# Altium PCB THERMO_RTD_SENSOR_2CH.PcbDoc (part 1 of 3)
Units mm, origin at the board's own origin, x right, y up, seen from the top; angles counter-clockwise.
Board outline 24 x 76.5 mm, 4 copper layers (L1, P2, L3, L4), stack 1.512 mm thick; 154 components, 120 nets, 487 pads, 253 vias.
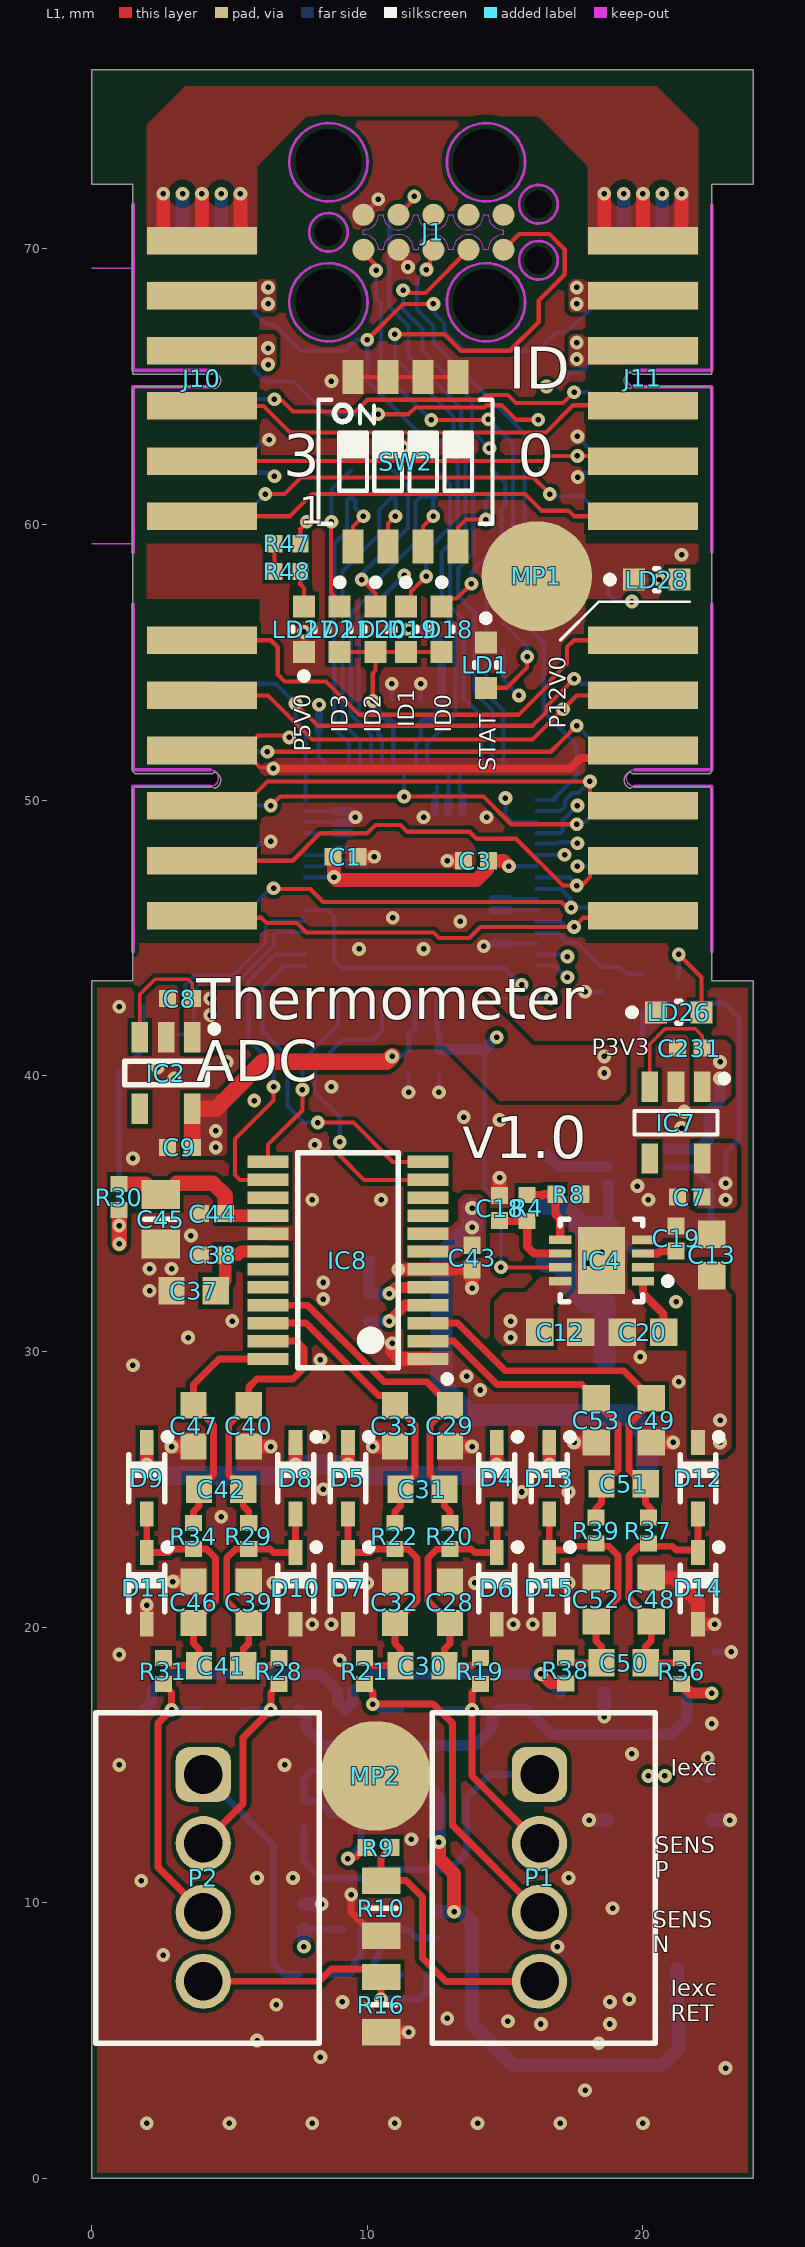
[diagram p0: L1 view]
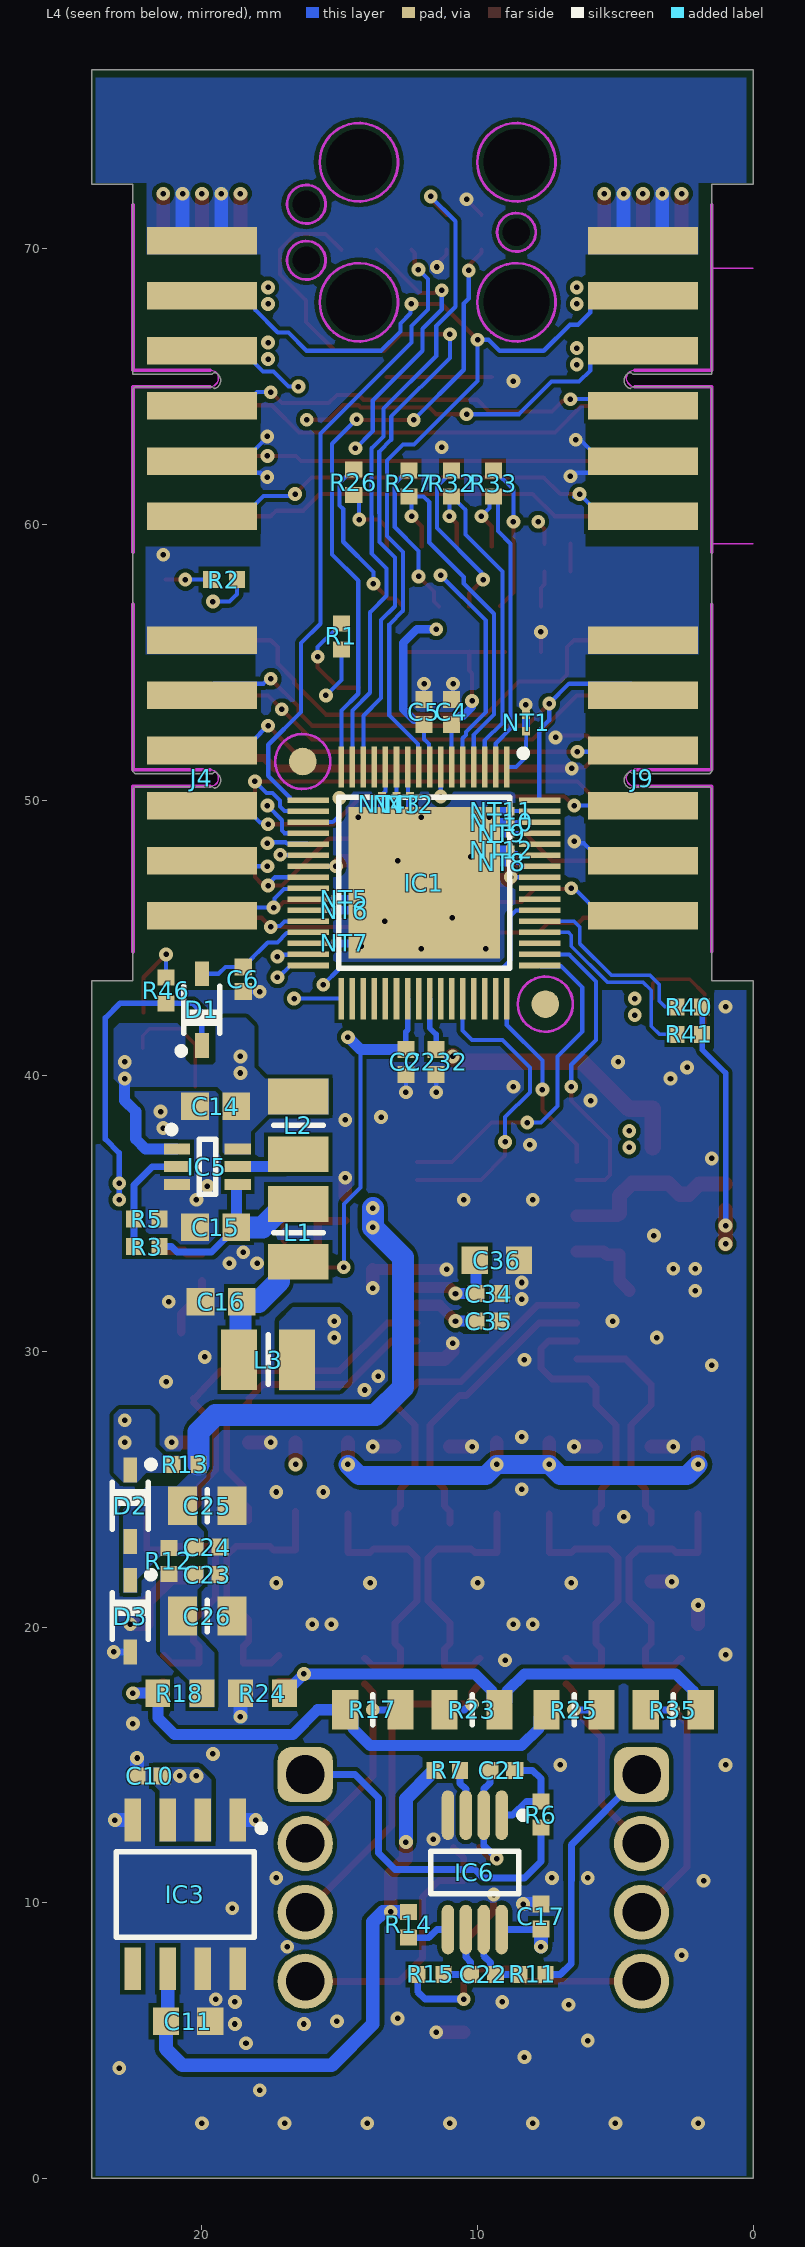
[diagram p1: L4 view, seen from below]
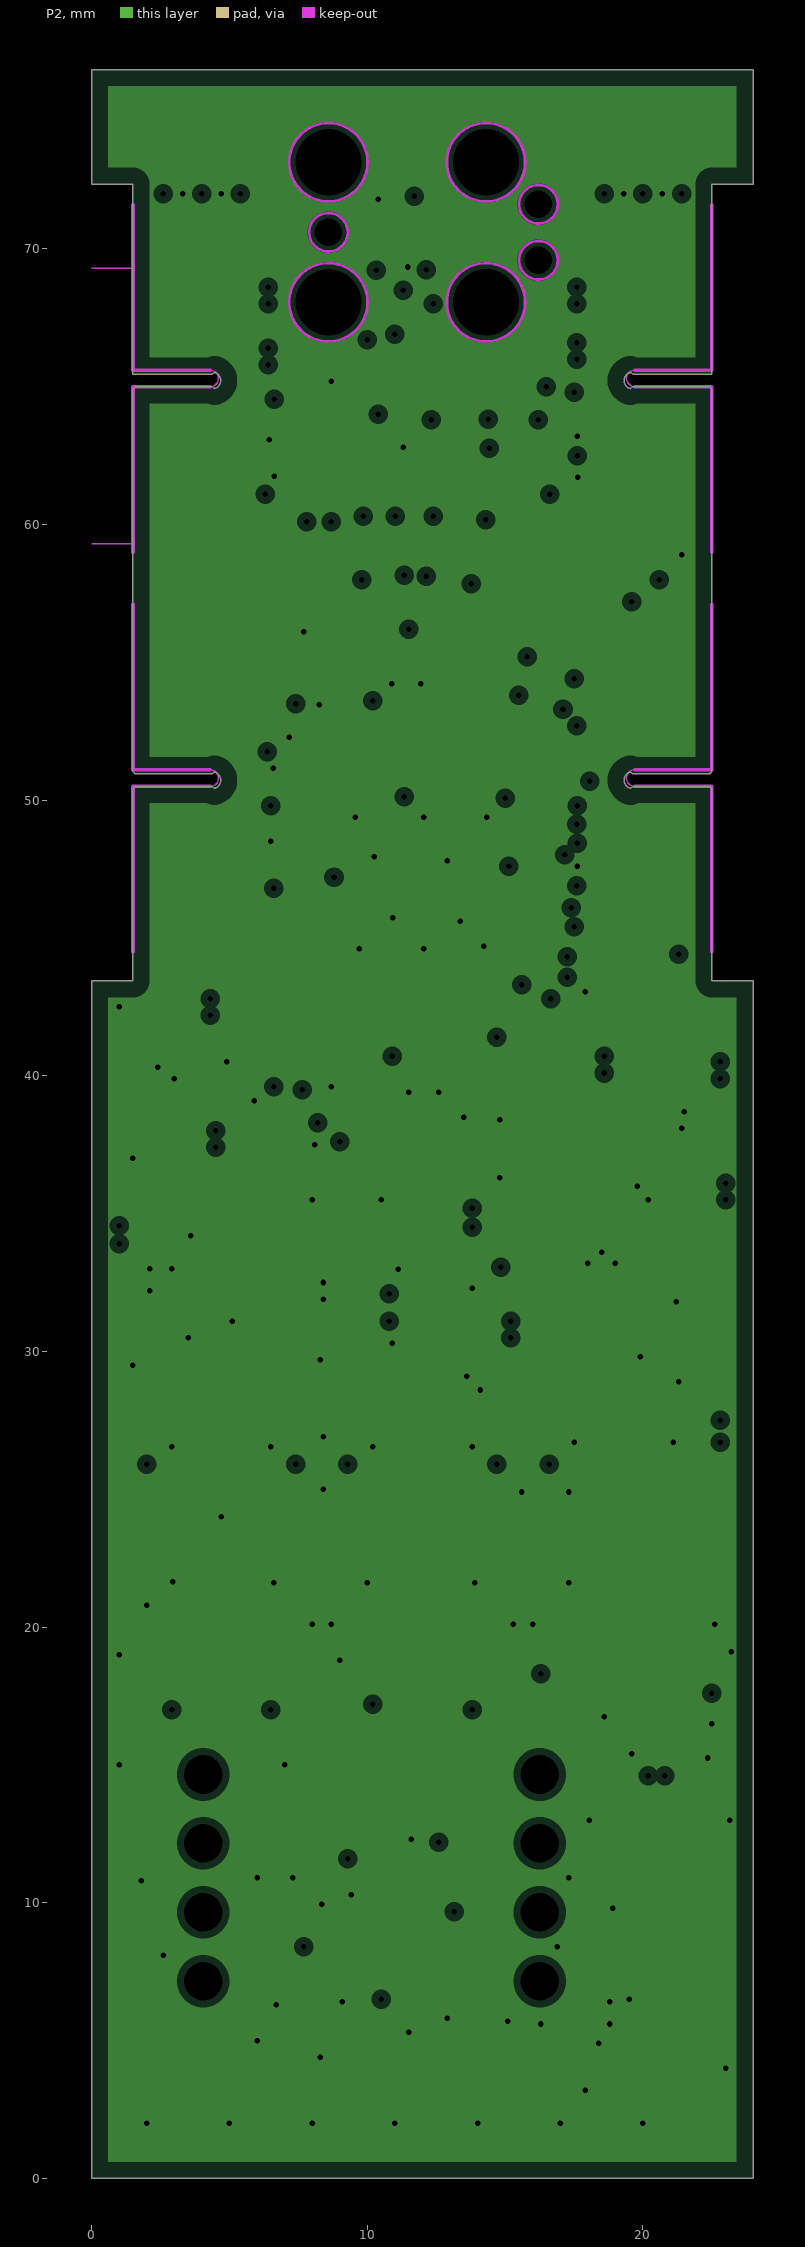
[diagram p2: P2, clearances drawn from the general rule]
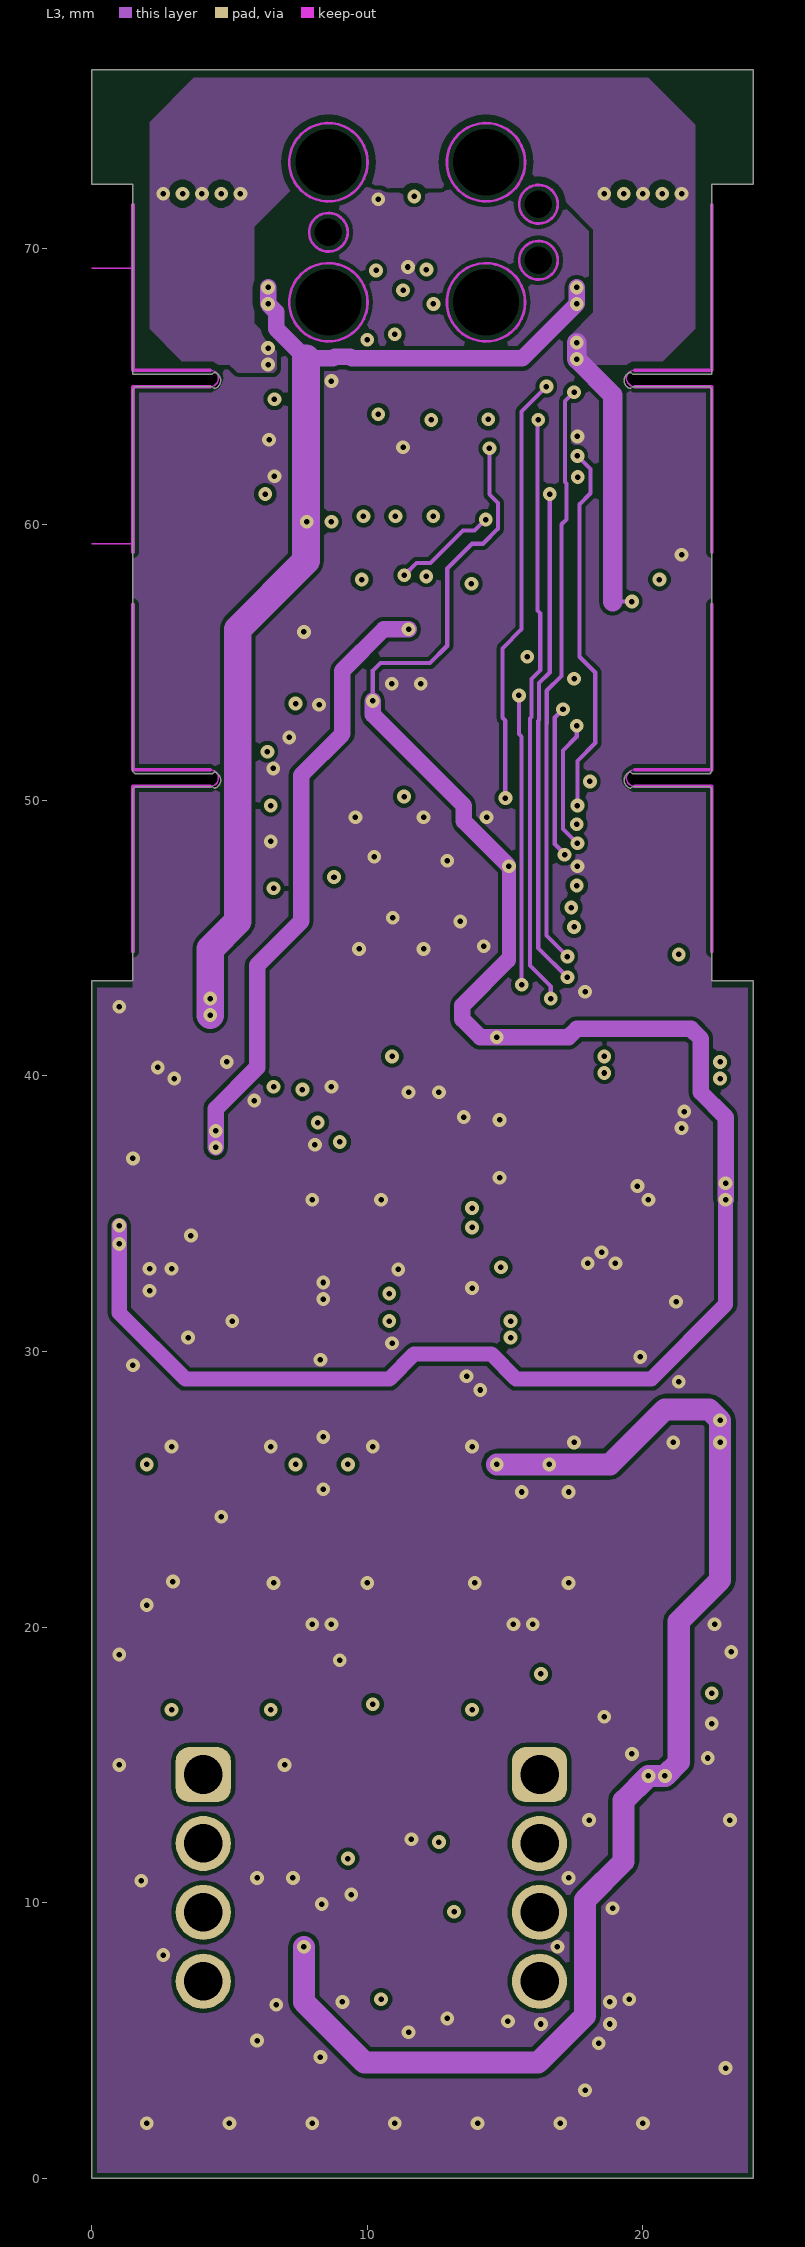
[diagram p3: L3]
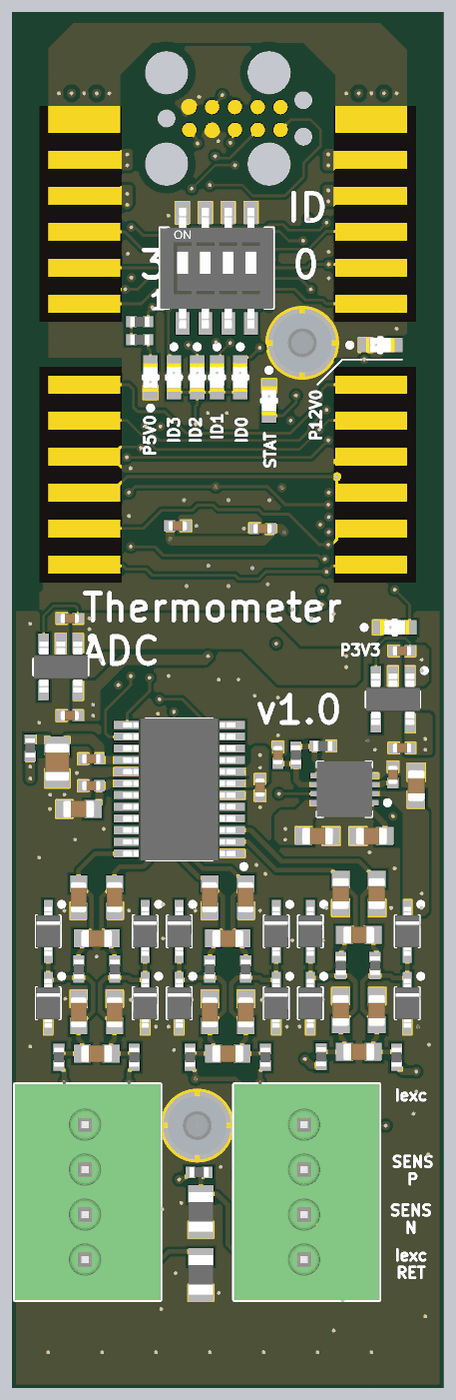
[diagram p5: 3D render of the assembled board from above, using the file's embedded part models]
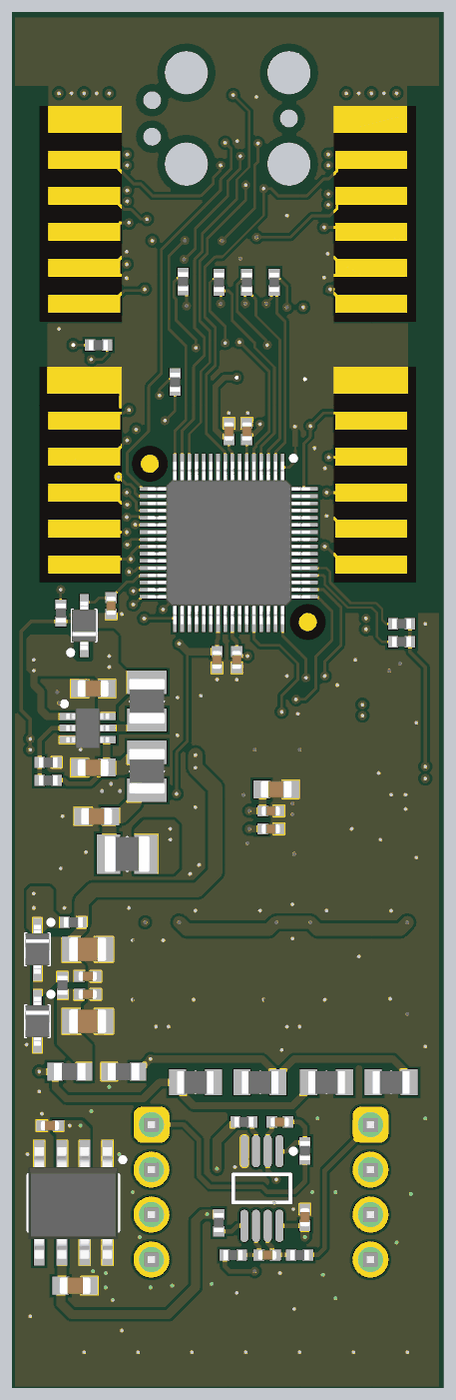
[diagram p6: 3D render of the assembled board from below, using the file's embedded part models]

## Layer stack, top to bottom
TopSolder: solder mask 0.025, Solder Resist, Dk 3.7
L1: signal copper 0.035
Dielectric1: core 0.138, FR-4, Dk 4.3
P2: plane copper 0.018, net GND
Dielectric3: core 1.13, FR-4, Dk 4.6
L3: signal copper 0.018
Dielectric5: core 0.138, FR-4, Dk 4.3
L4: signal copper 0.035
BottomSolder: solder mask 0.025, Solder Resist, Dk 3.7

## Board outline
0,0 0,43.44 1.5,43.44 1.5,50.413 1.577,50.49 4.377,50.49 4.452,50.428 ccw(c4.377,50.723) 4.681,50.723 ccw(c4.377,50.723) 4.452,51.019 4.377,50.957 1.577,50.957 1.5,51.033 1.5,57.023 1.5,64.913 1.577,64.99 4.377,64.99 4.452,64.928 ccw(c4.377,65.223) 4.681,65.223 ccw(c4.377,65.223) 4.452,65.519 4.377,65.457 1.5,65.457 1.5,72.347 0,72.347 0,76.5 24,76.5 24,72.347 22.5,72.347 22.5,65.457 19.623,65.457 19.548,65.519 ccw(c19.623,65.223) 19.319,65.223 ccw(c19.623,65.223) 19.548,64.928 19.623,64.99 22.423,64.99 22.5,64.913 22.5,57.023 22.5,51.033 22.423,50.957 19.623,50.957 19.548,51.019 ccw(c19.623,50.723) 19.319,50.723 ccw(c19.623,50.723) 19.548,50.428 19.623,50.49 22.423,50.49 22.5,50.413 22.5,43.44 24,43.44 24,0

## Design rules (kind name [scope] priority, off if disabled: settings)
Clearance Clearance_DIFF [(InDifferentialPairClass('All Differential Pairs'))] p1: gap=0.127 ignorepadtopadclearanceinfootprint=FALSE except(0: Arc-Hole Track-Hole SMDPad-Hole THPad-Hole Via-Hole Fill-Hole Poly-Hole Region-Hole Text-Hole; 0.254: Arc-Poly Track-Poly SMDPad-Poly THPad-Poly Via-Poly Fill-Poly Poly-Poly Poly-Region Poly-Text)
Clearance [All] p2: gap=0.127 ignorepadtopadclearanceinfootprint=FALSE except(0: Arc-Hole Track-Hole SMDPad-Hole THPad-Hole Via-Hole Fill-Hole Poly-Hole Region-Hole Text-Hole; 0.15: Arc-Poly Track-Poly SMDPad-Poly THPad-Poly Via-Poly Fill-Poly Poly-Poly)
ComponentClearance [All] p1 off: gap=0.254 collisioncheckmode=3 verticalgap=0.254 showdistances=FALSE
DiffPairsRouting [All] p1: maxlimit=0.254 minlimit=0.127 mostfreqgap=0.127 toplayer_minwidth=0.127 toplayer_maxwidth=0.381 toplayer_prefwidth=0.254 midlayer1_minwidth=0.127 midlayer1_maxwidth=0.381 midlayer1_prefwidth=0.254 bottomlayer_minwidth=0.127 bottomlayer_maxwidth=0.381 bottomlayer_prefwidth=0.254 maxuncoupledlength=12.7
FabricationTestPointUsage TestPointUsage [All] p1: valid=0 allowmultiple=FALSE
FabricationTestpoint Testpoint [All] p1: side=3 testpointundercomponent=TRUE minsize=1.016 maxsize=2.54 preferedsize=1.524 minholesize=0.508 maxholesize=1.016 preferedholesize=0.813 testpointgrid=0.025 allowsidetop=TRUE allowsidebottom=TRUE usegrid=TRUE gridtolerance=0
Height [All] p1 off: minheight=0 maxheight=25.4 prefheight=12.7
HoleSize [All] p1: absolutevalues=TRUE maxlimit=3.81 minlimit=0.025 maxpercent=80.000 minpercent=20.000
HoleToHoleClearance [All] p1: gap=0.025 allowstackedmicrovias=TRUE
MinimumSolderMaskSliver [All] p1: minsoldermaskwidth=0
PlaneClearance [All] p1: clearance=0.254
PlaneConnect [All] p1: planeconnectstyle=Direct reliefexpansion=0.508 reliefentries=4 reliefconductorwidth=0.254 reliefairgap=0.254
PolygonConnect [All] p1: connectstyle=Direct reliefconductorwidth=0.254 reliefentries=4 polygonreliefangle="45 Angle" airgapwidth=0.254
PolygonConnect PolygonConnect_pad [(InPadClass('All Pads'))] p2: connectstyle=Relief reliefconductorwidth=0.254 reliefentries=4 polygonreliefangle="90 Angle" airgapwidth=0.254
RoutingVias [All] p1: holewidth=0.2 width=0.5 viastyle="Through Hole" minholewidth=0.2 minwidth=0.5 maxholewidth=1 maxwidth=2
SilkToSilkClearance [All] p1: silktosilkclearance=0
SilkToSolderMaskClearance SilkscreenOverComponentPads [IsPad] p1: minsilkscreentomaskgap=0 clearancetoexposedcopper=TRUE
SolderMaskExpansion [All] p1: expansion=0.051 istentingtop=FALSE
SupplyNets "Schematic Supply Nets_6" [InNet('P5V0A')] p1: voltage=0.000
SupplyNets "Schematic Supply Nets_5" [InNet('P6V0A')] p2: voltage=0.000
SupplyNets "Schematic Supply Nets_2" [InNet('P1V8')] p3: voltage=0.000
SupplyNets "Schematic Supply Nets_4" [InNet('P5V0')] p4: voltage=0.000
SupplyNets "Schematic Supply Nets_3" [InNet('GND')] p5: voltage=0.000
SupplyNets "Schematic Supply Nets_1" [InNet('P12V0')] p6: voltage=0.000
SupplyNets "Schematic Supply Nets" [InNet('P3V3')] p7: voltage=0.000
Width "Schematic Width Constraint_3" [InNet('SENS0_P')] p1: maxlimit=0.381 minlimit=0.254 preferedwidth=0.254
Width "Schematic Width Constraint_2" [InNet('SENS1_N')] p2: maxlimit=0.381 minlimit=0.254 preferedwidth=0.254
Width "Schematic Width Constraint_1" [InNet('SENS0_N')] p3: maxlimit=0.381 minlimit=0.254 preferedwidth=0.254
Width "Schematic Width Constraint" [InNet('SENS1_P')] p4: maxlimit=0.381 minlimit=0.254 preferedwidth=0.254
Width [All] p5: maxlimit=1.27 minlimit=0.127 preferedwidth=0.127
18 further rules are at their usual default settings.

## Classes and differential pairs
component class THERMO_RTD_SENSOR_2CH: C10 C11 C12 C13 C14 C15 C16 C17 C18 C19 C20 C21 C22 C23 C24 C25 C26 C28 C29 C30 C31 C32 C33 C34 C35 C36 C37 C38 C39 C40 C41 C42 C43 C44 C45 C46 C47 C48 C49 C50 C51 C52 C53 D2 D3 D4 D5 D6 D7 D8 D9 D10 D11 D12 D13 D14 D15 IC3 IC4 IC5 IC6 IC8 L1 L2 L3 P1 P2 R3 R4 R5 R6 R7 R8 R9 R10 R11 R12 R13 R14 R15 R16 R17 R18 R19 R20 R21 R22 R23 R24 R25 R28 R29 R30 R31 R34 R35 R36 R37 R38 R39 R40 R41
component class U_SPI_IFC: C1 C2 C3 C4 C5 C6 C7 C8 C9 C231 C232 D1 IC1 IC2 IC7 J1 J4 J9 J10 J11 LD1 LD18 LD19 LD20 LD21 LD26 LD27 LD28 MP1 MP2 NT1 NT2 NT3 NT4 NT5 NT6 NT7 NT8 NT9 NT10 NT11 NT12 R1 R2 R26 R27 R32 R33 R46 R47 R48 SW2

## Components (designator, comment, footprint, x,y, rotation, side; value= is the part's Value field where it differs from the comment)
C1 "1uF" CAPC1005X55N 9.212,47.947 r180 top
C2 "1uF" CAPC1005X55N 12.6,40.5 r90 bottom
C3 "1uF" CAPC1005X55N 13.943,47.8 r0 top
C4 "1uF" CAPC1005X55N 10.94,53.2 r270 bottom
C5 "1uF" CAPC1005X55N 11.94,53.2 r270 bottom
C6 "1uF" CAPC1005X55N 18.5,43.5 r90 bottom
C7 "1uF" CAPC1005X55N 21.7,35.6 r0 top
C8 "1uF" CAPC1005X55N 3.2,42.8 r0 top
C9 "1uF" CAPC1005X55N 3.2,37.4 r0 top
C10 "100nF" CAPC1005X55N 21.9,14.6 r0 bottom
C11 "1uF" CAPC1608X87N 20.5,5.7 r0 bottom
C12 "10uF" CAPC1608X80N 17,30.7 r180 top
C13 "10uF" CAPC1608X80N 22.5,33.5 r270 top
C14 "10uF" CAPC1608X80N 19.5,38.9 r180 bottom
C15 "10uF" CAPC1608X80N 19.5,34.5 r180 bottom
C16 "10uF" CAPC1608X80N 19.3,31.8 r180 bottom
C17 "100nF" CAPC1005X55N 7.7,9.5 r270 bottom
C18 "1uF" CAPC1005X55N 14.8,35.2 r270 top
C19 "1uF" CAPC1005X55N 21.2,34.1 r270 top
C20 "10uF" CAPC1608X80N 20,30.7 r0 top
C21 "1nF" CAPC1005X55N 9.1,14.8 r180 bottom
C22 "1nF" CAPC1005X55N 9.8,7.4 r180 bottom
C23 "100nF" CAPC1005X55N 19.8,21.9 r180 bottom
C24 "100nF" CAPC1005X55N 19.8,22.9 r180 bottom
C25 "10uF" CAPC2012X135N 19.8,24.4 r180 bottom
C26 "10uF" CAPC2012X135N 19.8,20.4 r180 bottom
C28 "1nF" CAPC1608X90N 13,20.9 r90 top
C29 "1nF" CAPC1608X90N 13,27.3 r270 top
C30 "10nF" CAPC1608X87N 12,18.6 r180 top
C31 "10nF" CAPC1608X87N 12,25 r180 top
C32 "1nF" CAPC1608X90N 11,20.9 r270 top
C33 "1nF" CAPC1608X90N 11,27.3 r90 top
C34 "100nF" CAPC1005X55N 9.6,32.1 r180 bottom
C35 "100nF" CAPC1005X55N 9.6,31.1 r180 bottom
C36 "1uF" CAPC1608X87N 9.3,33.3 r0 bottom
C37 "1uF" CAPC1608X87N 3.7,32.2 r0 top
C38 "100nF" CAPC1005X55N 4.4,33.5 r180 top
C39 "1nF" CAPC1608X90N 5.7,20.9 r90 top
C40 "1nF" CAPC1608X90N 5.7,27.3 r270 top
C41 "10nF" CAPC1608X87N 4.7,18.6 r180 top
C42 "10nF" CAPC1608X87N 4.7,25 r180 top
C43 "100nF" CAPC1005X55N 13.8,33.4 r270 top
C44 "100nF" CAPC1005X55N 4.4,35 r180 top
C45 "10uF" CAPC2012X135N 2.5,34.8 r270 top
C46 "1nF" CAPC1608X90N 3.7,20.9 r270 top
C47 "1nF" CAPC1608X90N 3.7,27.3 r90 top
C48 "10nF" CAPC1608X87N 20.3,21 r90 top
C49 "10nF" CAPC1608X87N 20.3,27.5 r270 top
C50 "100nF" CAPC1608X87N 19.3,18.7 r0 top
C51 "100nF" CAPC1608X87N 19.3,25.2 r0 top
C52 "10nF" CAPC1608X87N 18.3,21 r270 top
C53 "10nF" CAPC1608X87N 18.3,27.5 r90 top
C231 "1uF" CAPC1005X55N 21.7,41 r0 top
C232 "1uF" CAPC1005X55N 11.5,40.5 r90 bottom
D1 "BAT165" SOD2512X110N 20,42.4 r90 bottom
D2 "BAS416" SOD2512X110N 22.6,24.4 r270 bottom
D3 "BAS416" SOD2512X110N 22.6,20.4 r270 bottom
D4 "BAS416" SOD2512X110N 14.7,25.4 r270 top
D5 "BAS416" SOD2512X110N 9.3,25.4 r270 top
D6 "BAS416" SOD2512X110N 14.7,21.4 r270 top
D7 "BAS416" SOD2512X110N 9.3,21.4 r270 top
D8 "BAS416" SOD2512X110N 7.4,25.4 r270 top
D9 "BAS416" SOD2512X110N 2,25.4 r270 top
D10 "BAS416" SOD2512X110N 7.4,21.4 r270 top
D11 "BAS416" SOD2512X110N 2,21.4 r270 top
D12 "BAS416" SOD2512X110N 22,25.4 r270 top
D13 "BAS416" SOD2512X110N 16.6,25.4 r270 top
D14 "BAS416" SOD2512X110N 22,21.4 r270 top
D15 "BAS416" SOD2512X110N 16.6,21.4 r270 top
IC1 "5M160ZE64A5N" QFP40P900X900X120-65N-S550 11.94,47 r270 bottom locked
IC2 "AP2112K-1.8TRG1" SOT95P285X140-5N 2.7,40.1 r270 top
IC3 "LM4140ACM-1.2/NOPB" SOIC127P600X175-8N 20.6,10.3 r270 bottom
IC4 "ADM7151ACPZ" SON50P300X300X80-9N-R170X244 18.5,33.3 r180 top
IC5 "TPS61222DCKT" SOT65P210X110-6N 19.8,36.7 r180 bottom
IC6 "ADA4528-2ARMZ-RL" ADI-RM-8_N 10.1,11.1 r270 bottom
IC7 "AP2112K-3.3TRG1" SOT95P285X140-5N 21.2,38.3 r270 top
IC8 "AD7172-2BRUZ" SOP65P640X120-24N 9.3,33.3 r180 top
J1 "TC2050-IDC" TC2050-IDC 12.4,70.6 r0 top
J4 "" EDGE12T1B6_P200W1000L0F100X400 20,50.8 r270 bottom
J9 "" EDGE12T5B10_P200W1000L0F100X400 4,50.8 r90 bottom
J10 "" EDGE12T1B6_P200W1000L0F100X400 4,65.3 r270 top
J11 "" EDGE12T5B10_P200W1000L0F100X400 20,65.3 r90 top
L1 "4.7uH" INDC2520X120N 16.5,34.3 r270 bottom
L2 "4.7uH" INDC2520X120N 16.5,38.2 r270 bottom
L3 "4.7uH" INDC2520X120N 17.6,29.7 r180 bottom
LD1 "Green" LED_KINGBRIGHT_KP-1608CGCK 14.3,54.9 r270 top
LD18 "Green" LED_KINGBRIGHT_KP-1608CGCK 12.7,56.2 r270 top
LD19 "Green" LED_KINGBRIGHT_KP-1608CGCK 11.4,56.2 r270 top
LD20 "Green" LED_KINGBRIGHT_KP-1608CGCK 10.3,56.2 r270 top
LD21 "Green" LED_KINGBRIGHT_KP-1608CGCK 9,56.2 r270 top
LD26 "Green" LED_KINGBRIGHT_KP-1608CGCK 21.3,42.3 r0 top
LD27 "Green" LED_KINGBRIGHT_KP-1608CGCK 7.7,56.2 r90 top
LD28 "Green" LED_KINGBRIGHT_KP-1608CGCK 20.5,58 r0 top
MP1 "M1.6 x 3mm" 97730306330 16.15,58.125 r0 top
MP2 "M1.6 x 3mm" 97730306330 10.3,14.6 r0 top
NT1 "Net Tie" "Net Tie 3" 8.24,52.5 r90 bottom net-tie
NT2 "Net Tie" "Net Tie 3" 12.453,50.148 r270 bottom net-tie
NT3 "Net Tie" "Net Tie 3" 12.94,50.148 r270 bottom net-tie
NT4 "Net Tie" "Net Tie 3" 13.463,50.148 r270 bottom net-tie
NT5 "Net Tie" "Net Tie 3" 15.14,46.4 r180 bottom net-tie
NT6 "Net Tie" "Net Tie 3" 15.14,46 r180 bottom net-tie
NT7 "Net Tie" "Net Tie 3" 15.14,44.8 r180 bottom net-tie
NT8 "Net Tie" "Net Tie 3" 8.814,47.75 r0 bottom net-tie
NT9 "Net Tie" "Net Tie 3" 8.814,48.8 r0 bottom net-tie
NT10 "Net Tie" "Net Tie 3" 8.814,49.2 r0 bottom net-tie
NT11 "Net Tie" "Net Tie 3" 8.814,49.6 r0 bottom net-tie
NT12 "Net Tie" "Net Tie 3" 8.814,48.2 r0 bottom net-tie
P1 "691382000004" 691382000004 16.4,10.9 r270 top
P2 "691382000004" 691382000004 4.2,10.9 r270 top
R1 "3k3" RESC1005X40N 14.94,55.941 r270 bottom
R2 "10k" RESC1005X40N 19.2,58 r0 bottom
R3 "36k" RESC1005X40N 22,33.8 r180 bottom
R4 "91k" RESC1005X40N 15.8,35.2 r270 top
R5 "3k3" RESC1005X40N 22,34.8 r0 bottom
R6 "120k" RESC1005X40N 7.7,13.2 r270 bottom
R7 "120k" RESC1005X40N 11.1,14.8 r180 bottom
R8 "36k" RESC1005X40N 17.3,35.7 r180 top
R9 "0" RESC1005X40N 10.4,12 r0 top
R10 "120k" RESC2012X60N 10.5,9.8 r90 top
R11 "120k" RESC1005X40N 8,7.4 r180 bottom
R12 "33" RESC1005X40N 21.2,22.4 r90 bottom
R13 "33" RESC1005X40N 20.6,25.9 r0 bottom
R14 "120k" RESC1005X40N 12.5,9.2 r270 bottom
R15 "0" RESC1005X40N 11.7,7.4 r0 bottom
R16 "120k" RESC2012X60N 10.5,6.3 r90 top
R17 "5k" RESC2013X64N 13.8,17 r0 bottom
R18 "0" RESC1608X55N 20.8,17.6 r180 bottom
R19 "51" RESC1005X40N 14.1,18.4 r90 top
R20 "2k7" RESC1005X40N 13,23.3 r90 top
R21 "51" RESC1005X40N 9.9,18.4 r90 top
R22 "2k7" RESC1005X40N 11,23.3 r90 top
R23 "5k" RESC2013X64N 10.2,17 r180 bottom
R24 "0" RESC1608X55N 17.8,17.6 r0 bottom
R25 "5k" RESC2013X64N 6.5,17 r0 bottom
R26 "3k3" RESC1005X40N 14.491,61.532 r270 bottom
R27 "3k3" RESC1005X40N 12.493,61.49 r270 bottom
R28 "51" RESC1005X40N 6.8,18.4 r90 top
R29 "2k7" RESC1005X40N 5.7,23.3 r90 top
R30 "33" RESC1005X40N 1,35.6 r270 top
R31 "51" RESC1005X40N 2.6,18.4 r90 top
R32 "3k3" RESC1005X40N 10.94,61.49 r270 bottom
R33 "3k3" RESC1005X40N 9.414,61.49 r270 bottom
R34 "2k7" RESC1005X40N 3.7,23.3 r90 top
R35 "5k" RESC2013X64N 2.9,17 r180 bottom
R36 "270" RESC1005X40N 21.4,18.4 r90 top
R37 "270" RESC1005X40N 20.2,23.5 r90 top
R38 "270" RESC1005X40N 17.2,18.43 r90 top
R39 "270" RESC1005X40N 18.3,23.5 r90 top
R40 "3k3" RESC1005X40N 2.32,42.5 r0 bottom
R41 "3k3" RESC1005X40N 2.32,41.5 r0 bottom
R46 "3k3" RESC1005X40N 21.3,43.1 r270 bottom
R47 "3k3" RESC1005X40N 7.1,59.3 r0 top
R48 "3k3" RESC1005X40N 7.1,58.3 r180 top
SW2 "Switch" SW_OMRON_A6H-4102 11.39,62.275 r90 top

## Footprints (in the part's own frame and the unit in brackets; to place one, negate y for a bottom-side part, rotate by r counter-clockwise, add the part's x,y. Pads: shape width x height; smd on the part's side, far side on the other; paste and mask are expansions set on the pad)
97730306330 [mm] "SMT Steel Spacer with internal Thread M1.6 Bottom closed, height 3mm"
  round 4 smd paste-2539.97: 1(0,0)
  body extent -1.65,-1.65 1.65,1.65, height 3
691382000004 [mm] "Vertical PCB Header, pitch 2.5mm, 04p"
  rrect50% 2x2 hole 1.4: 1(-3.75,-0.15)
  round 2 hole 1.4: 2(-1.25,-0.15) 3(1.25,-0.15) 4(3.75,-0.15)
  silkscreen extent -6,-4.05 6,4.05, body extent -6,-4.05 6,4.05, height 10.14
ADI-RM-8_N [mm] "SOP, 8-Leads, Body 3x3mm, Pitch 0.65mm, IPC Medium Density"
  oval 1.8x0.45 smd: 1(-2.075,0.975) 2(-2.075,0.325) 3(-2.075,-0.325) 4(-2.075,-0.975) 5(2.075,-0.975) 6(2.075,-0.325) 7(2.075,0.325) 8(2.075,0.975)
  silkscreen extent -2.2,-1.6 0.77,1.87, body extent -1.6,-1.6 1.6,1.6, height 1.1
CAPC1005X55N [mm] "Capacitor, Non-Polarized, Chip; 1.00mm L X 0.50mm W X 0.70mm H, IPC Medium Density"
  rect 0.62x0.62 smd: 1(-0.45,0) 2(0.45,0)
  body extent -0.52,-0.27 0.53,0.28, height 0.55
CAPC1608X80N [mm] "Chip Capacitor, Body 1.6x0.8mm IPC Medium Density"
  rect 1x1 smd: 1(-0.75,0) 2(0.75,0)
  body extent -0.87,-0.47 0.88,0.48, height 0.8
CAPC1608X87N [mm] "Chip Capacitor, Body 1.6x0.8mm IPC Medium Density"
  rect 0.95x1 smd: 1(-0.8,0) 2(0.8,0)
  body extent -0.87,-0.47 0.88,0.48, height 0.87
CAPC1608X90N [mm] "Chip Capacitor, Body 1.6x0.8mm IPC Medium Density"
  rect 0.95x0.95 smd: 1(-0.75,0) 2(0.75,0)
  body extent -0.85,-0.45 0.85,0.45, height 0.9
CAPC2012X135N [mm] "Chip Capacitor, Body 2.0x1.25mm, IPC Medium Density"
  rect 1.05x1.4 smd: 1(-0.9,0) 2(0.9,0)
  silkscreen extent 0,-0.58 0,0.58, body extent -1.05,-0.67 1.05,0.68, height 1.25
EDGE12T1B6_P200W1000L0F100X400 [mm] "12 contacts Board Edge Connector, First Left Top Pad 1, First Left Bottom Pad 2, Pitch 2mm, Length 0mm, Width 12.5mm, Finger Lenght 4mm, Finger Width 1mm"
  rect 1x4 smd paste-0.5: 1(-5,0) 2(-3,0) 3(-1,0) 4(1,0) 5(3,0) 6(5,0)
  rect 1x4 smd far side paste-0.5: 7(-5,0) 8(-3,0) 9(-1,0) 10(1,0) 11(3,0) 12(5,0)
  KeepOutLayer lines w0.05: 0.3,0.3 ccw(c0,0.3) -0.3,0.3
  KeepOutLayer lines w0.13: 0.3,0.3 0.3,-2.5 6.3,-2.5 ; -0.3,0.3 -0.3,-2.5 -6.3,-2.5
EDGE12T5B10_P200W1000L0F100X400 [mm] "12 contacts Board Edge Connector, First Left Top Pad 5, First Left Bottom Pad 10, Pitch 2mm, Length 0mm, Width 12.5mm, Finger Lenght 4mm, Finger Width 1mm"
  rect 1x4 smd paste-0.5: 1(5,0) 2(3,0) 3(1,0) 4(-1,0) 5(-3,0) 6(-5,0)
  rect 1x4 smd far side paste-0.5: 7(5,0) 8(3,0) 9(1,0) 10(-1,0) 11(-3,0) 12(-5,0)
  KeepOutLayer lines w0.05: -0.3,0.3 cw(c0,0.3) 0.3,0.3
  KeepOutLayer lines w0.13: -6.3,-2.5 -0.3,-2.5 -0.3,0.3 ; 6.3,-2.5 0.3,-2.5 0.3,0.3
INDC2520X120N [mm] "Chip Inductor, EIA 1008, Metric 2520, Body 2.50mm L X 2.00mm W X 1.20mm H body, IPC Medium Density"
  rect 1.3x2.2 smd: 1(-1.05,0) 2(1.05,0)
  silkscreen extent 0,-0.9 0,0.9, body extent -1.25,-1 1.25,1, height 1.2
LED_KINGBRIGHT_KP-1608CGCK [mm] "SMT Green LED, Case 0603, Body L 1.60mm x W 0.80mm x H 1.10mm"
  rect 0.8x0.8 smd: 1(-0.825,0) 2(0.825,0)
  silkscreen extent -1.82,-0.4 0.08,0.4, body extent -0.8,-0.4 0.8,0.4, height 1.1
"Net Tie 3" [mm] "SMD Net Tie"
  rect 0.3x0.3 smd paste-2539.97 mask-0.064: 1(0,0) 2(0.6,0)
  L1 lines w0.3: 0,0 0.6,0
QFP40P900X900X120-65N-S550 [mm] "QFP, 0.40mm Pitch, Square; 64 Pin, 7.00mm L X 7.00mm W X 1.20mm H Body (w/Thermal Tab), IPC Medium Density"
  rect 1.5x0.2 smd: 1(-4.2,3) 2(-4.2,2.6) 3(-4.2,2.2) 4(-4.2,1.8) 5(-4.2,1.4) 6(-4.2,1) 7(-4.2,0.6) 8(-4.2,0.2) 9(-4.2,-0.2) 10(-4.2,-0.6) 11(-4.2,-1) 12(-4.2,-1.4) 13(-4.2,-1.8) 14(-4.2,-2.2) 15(-4.2,-2.6) 16(-4.2,-3) 33(4.2,-3) 34(4.2,-2.6) 35(4.2,-2.2) 36(4.2,-1.8) 37(4.2,-1.4) 38(4.2,-1) 39(4.2,-0.6) 40(4.2,-0.2) 41(4.2,0.2) 42(4.2,0.6) 43(4.2,1) 44(4.2,1.4) 45(4.2,1.8) 46(4.2,2.2) 47(4.2,2.6) 48(4.2,3)
  rect 0.2x1.5 smd: 17(-3,-4.2) 18(-2.6,-4.2) 19(-2.2,-4.2) 20(-1.8,-4.2) 21(-1.4,-4.2) 22(-1,-4.2) 23(-0.6,-4.2) 24(-0.2,-4.2) 25(0.2,-4.2) 26(0.6,-4.2) 27(1,-4.2) 28(1.4,-4.2) 29(1.8,-4.2) 30(2.2,-4.2) 31(2.6,-4.2) 32(3,-4.2) 49(3,4.2) 50(2.6,4.2) 51(2.2,4.2) 52(1.8,4.2) 53(1.4,4.2) 54(1,4.2) 55(0.6,4.2) 56(0.2,4.2) 57(-0.2,4.2) 58(-0.6,4.2) 59(-1,4.2) 60(-1.4,4.2) 61(-1.8,4.2) 62(-2.2,4.2) 63(-2.6,4.2) 64(-3,4.2)
  rect 5.5x5.5 smd: 65(0,0)
  round 1 smd paste-0.51 mask+0.5: FTG1(-4.4,-4.4) FTG2(4.4,4.4)
  L1 keep-out circle w0.1: c4.4,4.4 r1
  L1 keep-out circle w0.1: c-4.4,-4.4 r1
  silkscreen extent -4.82,-3.1 3.1,3.72, body extent -4.52,-4.52 4.52,4.52, height 1.2
RESC1005X40N [mm] "Chip Resistor, EIA 0402, Metric 1005, Body 1.0x0.5mm, IPC Medium Density"
  rect 0.58x0.62 smd: 1(-0.47,0) 2(0.47,0)
  body extent -0.52,-0.27 0.53,0.28, height 0.4
RESC1608X55N [mm] "Chip Resistor, EIA 0603, Metric 1608, Body 1.6x0.8mm, IPC Medium Density"
  rect 0.9x1 smd: 1(-0.8,0) 2(0.8,0)
  body extent -0.87,-0.47 0.88,0.48, height 0.55
RESC2012X60N [mm] "Chip Resistor, EIA 0805, Metric 2012, Body 2.0x1.2mm, IPC Medium Density"
  rect 0.95x1.4 smd: 1(-1,0) 2(1,0)
  silkscreen extent 0,-0.55 0,0.55, body extent -1.1,-0.67 1.1,0.68, height 0.6
RESC2013X64N [mm] "Chip Resistor, EIA 0805, Metric 2013, Body 2.03x1.27mm, IPC Medium Density"
  rect 0.95x1.45 smd: 1(-1,0) 2(1,0)
  silkscreen extent 0,-0.55 0,0.55, body extent -1.02,-0.63 1.02,0.64, height 0.64
SOD2512X110N [mm] "Small Outline Diode (SOD-323), 1.70mm W X 1.25mm L X 1.10mm H body,  IPC Medium Density"
  rect 0.9x0.5 smd: 1(-1.3,0) 2(1.3,0)
  silkscreen extent -1.62,-0.65 0.85,0.88, body extent -1.35,-0.67 1.35,0.68, height 1.1
SOIC127P600X175-8N [mm] "SOIC 8, Pitch 1.27mm - Body 4x5mm, IPC Medium Density"
  rect 1.55x0.6 smd: 1(-2.7,1.905) 2(-2.7,0.635) 3(-2.7,-0.635) 4(-2.7,-1.905) 5(2.7,-1.905) 6(2.7,-0.635) 7(2.7,0.635) 8(2.7,1.905)
  silkscreen extent -2.52,-2.5 1.55,2.88, body extent -3.1,-2.5 3.1,2.5, height 1.75
SON50P300X300X80-9N-R170X244 [mm] "SON, (DFN) 0.50mm,pitch; 8 pin,3.00mm W X 3.00mm L X 0.80mm H body (w/thermal tab 1.7 X2.44mm), IPC Medium Density"
  rect 0.8x0.3 smd: 1(-1.5,0.75) 2(-1.5,0.25) 3(-1.5,-0.25) 4(-1.5,-0.75) 5(1.5,-0.75) 6(1.5,-0.25) 7(1.5,0.25) 8(1.5,0.75)
  rect 1.7x2.44 smd: 9(0,0)
  silkscreen extent -2.53,-1.5 1.5,1.5, body extent -1.55,-1.55 1.55,1.55, height 0.8
SOP65P640X120-24N [mm] "SOP, 0.65mm Pitch; 24 Pin, 4.40mm W X 7.80mm L X 1.20mm H Body, IPC Medium Density"
  rect 1.5x0.45 smd: 1(-2.9,3.575) 2(-2.9,2.925) 3(-2.9,2.275) 4(-2.9,1.625) 5(-2.9,0.975) 6(-2.9,0.325) 7(-2.9,-0.325) 8(-2.9,-0.975) 9(-2.9,-1.625) 10(-2.9,-2.275) 11(-2.9,-2.925) 12(-2.9,-3.575) 13(2.9,-3.575) 14(2.9,-2.925) 15(2.9,-2.275) 16(2.9,-1.625) 17(2.9,-0.975) 18(2.9,-0.325) 19(2.9,0.325) 20(2.9,0.975) 21(2.9,1.625) 22(2.9,2.275) 23(2.9,2.925) 24(2.9,3.575)
  silkscreen extent -3.73,-3.9 1.83,4.42, body extent -3.12,-3.95 3.12,3.95, height 1.2
SOT65P210X110-6N [mm] "SOT363, SC70-6, SOT, 0.65mm Pitch, 6 Pin, 1.25mm W X 2.00mm L X 1.10mm H, IPC Medium Density"
  rect 0.95x0.4 smd: 1(-1.1,0.65) 2(-1.1,0) 3(-1.1,-0.65) 4(1.1,-0.65) 5(1.1,0) 6(1.1,0.65)
  silkscreen extent -1.43,-1 0.3,1.47, body extent -1.2,-1.1 1.2,1.1, height 1.1
SOT95P285X140-5N [mm] "SOT23, 5-Leads, Body 3.00x2.85mm, Pitch 0.95mm, IPC Medium Density"
  rect 1.1x0.6 smd: 1(-1.3,0.95) 2(-1.3,0) 3(-1.3,-0.95) 4(1.3,-0.95) 5(1.3,0.95)
  silkscreen extent -1.72,-1.5 0.42,1.87, body extent -1.43,-1.5 1.43,1.5, height 1.4
SW_OMRON_A6H-4102 [mm] "Pitch 1.27mm, Body 6.31 x 4.5mm, 4 Ways SPST Surface-Mounting DIP Switch, OMRON A6H"
  rect 1.25x0.76 smd: 1(-3.075,1.905) 2(-3.075,0.635) 3(-3.075,-0.635) 4(-3.075,-1.905) 5(3.075,-1.905) 6(3.075,-0.635) 7(3.075,0.635) 8(3.075,1.905)
  silkscreen extent -2.25,-3.16 2.25,3.16, body extent -3.35,-3.15 3.35,3.16, height 1.55
TC2050-IDC [mm] "TAG-CONNECT IN-CIRCUIT Cable Legged"
  round 0.8 smd paste-0.4: 1(-2.54,-0.635) 2(-1.27,-0.635) 3(0,-0.635) 4(1.27,-0.635) 5(2.54,-0.635) 6(2.54,0.635) 7(1.27,0.635) 8(0,0.635) 9(-1.27,0.635) 10(-2.54,0.635)
  round 0.5 hole 2.4 unplated mask+0.95: Mech(-3.81,-2.54) Mech(-3.81,2.54) Mech(1.905,-2.54) Mech(1.905,2.54)
  round 0.5 hole 1 unplated mask+0.25: Mech(-3.81,0) Mech(3.81,-1.016) Mech(3.81,1.016)
  L1 keep-out region: -2.54,0.085 -2.33,0.127 -2.151,0.246 -2.032,0.425 -1.99,0.635 -1.99,0.635 -1.82,0.635 -1.778,0.425 -1.659,0.246 -1.48,0.127 -1.27,0.085 -1.27,0.085 -1.06,0.127 -0.881,0.246 -0.762,0.425 -0.72,0.635 -0.72,0.635 -0.55,0.635 -0.508,0.425 -0.389,0.246 -0.21,0.127 0,0.085 0,0.085 0.21,0.127 0.389,0.246 0.508,0.425 0.55,0.635 0.55,0.635 0.72,0.635 0.72,0.615 0.76,0.413 0.875,0.241 1.047,0.126 1.25,0.085 1.25,0.085 1.27,0.085 1.481,0.127 1.659,0.246 1.778,0.425 1.82,0.635 1.82,0.635 1.99,0.635 2.032,0.425 2.151,0.246 2.33,0.127 2.54,0.085 2.54,0.085 2.54,-0.085 2.33,-0.127 2.151,-0.246 2.032,-0.425 1.99,-0.635 1.99,-0.635 1.82,-0.635 1.778,-0.425 1.659,-0.246 1.48,-0.127 1.27,-0.085 1.27,-0.085 1.06,-0.127 0.881,-0.246 0.762,-0.425 0.72,-0.635 0.72,-0.635 0.55,-0.635 0.508,-0.425 0.389,-0.246 0.21,-0.127 0,-0.085 0,-0.085 -0.21,-0.127 -0.389,-0.246 -0.508,-0.425 -0.55,-0.635 -0.55,-0.635 -0.72,-0.635 -0.72,-0.615 -0.76,-0.413 -0.875,-0.241 -1.047,-0.126 -1.25,-0.085 -1.25,-0.085 -1.27,-0.085 -1.481,-0.127 -1.659,-0.246 -1.778,-0.425 -1.82,-0.635 -1.82,-0.635 -1.99,-0.635 -2.032,-0.425 -2.151,-0.246 -2.33,-0.127 -2.54,-0.085 -2.54,-0.085

## Part data
C1 C2 C3 C4 C5 C6 C7 C8 C9 C18 C19 C231 C232: library part CC0402_1UF_16V_10%_X5R, "Non-polarised capacitor", Case=0402, Manufacturer=GENERIC, Manufacturer1 ComponentHeight=0.55mm, Manufacturer1 Example=TDK, Manufacturer1 Part Number=C1005X5R1C105KT, Tolerance=±10%, Voltage=16V, Author="CERN DEM JLC", Component Type=Standard, CreateDate=25.10.2012, HelpURL=\\cern.ch\dfs\Applications\Altium\Datasheets\CC0402_X5R_TDK_C.pdf, LatestRevisionDate=25.10.2012, Manufacturer Part Number=CC0402_1UF_16V_10%_X5R, Mounted=Yes, Part Description="SMD Multilayer Chip Ceramic Capacitor", Part Number=CC0402_1UF_16V_10%_X5R, Pin Count=2, Sense=No, SMD=Yes, Socket=No, Status=Preferred, TC=X5R
C10 C17 C23 C24 C34 C35 C38 C43 C44: library part CC0402_100NF_16V_10%_X5R, "Non-polarised capacitor", Case=0402, Manufacturer=GENERIC, Manufacturer1 ComponentHeight=0.55mm, Manufacturer1 Example=MURATA, Manufacturer1 Part Number=GRM155R61C104KA88D, Tolerance=±10%, Voltage=16V, Author="CERN DEM JLC", Component Type=Standard, HelpURL=\\cern.ch\dfs\Applications\Altium\Datasheets\CC0402_X5R_MURATA_GRM.pdf, Manufacturer Part Number=CC0402_100NF_16V_10%_X5R, Mounted=Yes, Part Description="SMD Multilayer Chip Ceramic Capacitor", Part Number=CC0402_100NF_16V_10%_X5R, Pin Count=2, SMD=Yes, Socket=No, Status=None, TC=X5R
  C10 C17: CreateDate=10.12.2013, LatestRevisionDate=10.12.2013, Sense=No
  C23 C24 C34 C35 C38 C43 C44: CreateDate=2013-12-10, LatestRevisionDate=2013-12-10, Table="Capacitors SMD"
C11 C36 C37: library part CC0603_1UF_25V_10%_X7R, "Non-polarised capacitor", Case=0603, Manufacturer=GENERIC, Manufacturer1 ComponentHeight=0.9mm, Manufacturer1 Example=MURATA, Manufacturer1 Part Number=GRM188R71E105KA12D, Tolerance=±10%, Voltage=25V, Author="CERN DEM JLC", Component Type=Standard, CreateDate=18/01/2011, HelpURL=\\cern.ch\dfs\Applications\Altium\Datasheets\CC0603_X7R_MURATA.pdf, LatestRevisionDate=18/01/2011, Manufacturer Part Number=CC0603_1UF_25V_10%_X7R, Mounted=Yes, Part Description="SMD Multilayer Chip Ceramic Capacitor", Part Number=CC0603_1UF_25V_10%_X7R, Pin Count=2, Sense=No, SMD=Yes, Socket=No, Status=None, TC=X7R
C12 C13 C14 C15 C16 C20: library part CC0603_10UF_10V_10%_X5R, "Non-polarised capacitor", Case=0603, Manufacturer=GENERIC, Manufacturer1 ComponentHeight=0.8mm, Manufacturer1 Example=MURATA, Manufacturer1 Part Number=GRM188R61A106KE69D, Tolerance=±10%, Voltage=10V, Author="CERN DEM JLC", Component Type=Standard, CreateDate=31.01.2017, HelpURL=\\cern.ch\dfs\Applications\Altium\Datasheets\CC0603_MURATA_GRM188R61A106KE69D.pdf, LatestRevisionDate=31.01.2017, Manufacturer Part Number=CC0603_10UF_10V_10%_X5R, Mounted=Yes, Part Description="SMD Multilayer Chip Ceramic Capacitor", Part Number=CC0603_10UF_10V_10%_X5R, Pin Count=2, Sense=No, SMD=Yes, Socket=No, Status=None, TC=X5R
C21 C22: library part CC0402_1NF_50V_10%_X7R, "Non-polarised capacitor", Case=0402, Manufacturer=GENERIC, Manufacturer1 ComponentHeight=0.55mm, Manufacturer1 Example=PHYCOMP, Manufacturer1 Part Number=223858715623, Tolerance=±10%, Voltage=50V, Author="CERN DEM JLC", Component Type=Standard, CreateDate=03/12/2007, HelpURL=\\cern.ch\dfs\Applications\Altium\Datasheets\CC0402_X7R_PHYCOMP.pdf, LatestRevisionDate=03/12/2007, Manufacturer Part Number=CC0402_1NF_50V_10%_X7R, Mounted=Yes, Part Description="SMD Multilayer Chip Ceramic Capacitor", Part Number=CC0402_1NF_50V_10%_X7R, Pin Count=2, Sense=No, SMD=Yes, Socket=No, Status="Not Recommended", TC=X7R
C25 C26 C45: library part CC0805_10UF_16V_10%_X5R, "Non-polarised capacitor", Case=0805, Manufacturer=GENERIC, Manufacturer1 ComponentHeight=1.4mm, Manufacturer1 Example=KEMET, Manufacturer1 Part Number=C0805C106K4PAC, Tolerance=±10%, Voltage=16V, Author="CERN DEM JLC", Component Type=Standard, CreateDate=03.12.2007, HelpURL=\\cern.ch\dfs\Applications\Altium\Datasheets\CC1206_X5R_KEMET.pdf, LatestRevisionDate=03.12.2007, Manufacturer Part Number=CC0805_10UF_16V_10%_X5R, Mounted=Yes, Part Description="SMD Multilayer Chip Ceramic Capacitor", Part Number=CC0805_10UF_16V_10%_X5R, Pin Count=2, Sense=No, SMD=Yes, Socket=No, Status=Preferred, TC=X5R
C28 C29 C32 C33 C39 C40 C46 C47: library part CC0603_1NF_50V_5%_NP0, "Non-polarised capacitor", Case=0603, Manufacturer=GENERIC, Manufacturer1 ComponentHeight=0.9mm, Manufacturer1 Example="YAGEO PHYCOMP", Manufacturer1 Part Number=CC0603JRNPO9BN102, Tolerance=±5%, Voltage=50V, Author="CERN DEM JLC", Component Type=Standard, CreateDate=22.10.2012, HelpURL=\\cern.ch\dfs\Applications\Altium\Datasheets\CC0805_NP0_PHYCOMP_16VTO50V.pdf, LatestRevisionDate=22.10.2012, Manufacturer Part Number=CC0603_1NF_50V_5%_NP0, Mounted=Yes, Part Description="SMD Multilayer Chip Ceramic Capacitor", Part Number=CC0603_1NF_50V_5%_NP0, Pin Count=2, Sense=No, SMD=Yes, Socket=No, Status=Preferred, TC=C0G/NP0
C30 C31 C41 C42 C48 C49 C52 C53: library part CC0603_10NF_50V_5%_C0G, "Non-polarised capacitor", Case=0603, Manufacturer=GENERIC, Manufacturer1 ComponentHeight=0.9mm, Manufacturer1 Example=TDK, Manufacturer1 Part Number=C1608C0G1H103J080AA, Tolerance=±5%, Voltage=50V, Author="CERN DEM JLC", Component Type=Standard, HelpURL=\\cern.ch\dfs\Applications\Altium\Datasheets\CC0603_C0G_TDK_C.pdf, Manufacturer Part Number=CC0603_10NF_50V_5%_C0G, Mounted=Yes, Part Description="SMD Multilayer Chip Ceramic Capacitor", Part Number=CC0603_10NF_50V_5%_C0G, Pin Count=2, Sense=No, SMD=Yes, Socket=No, Status=Preferred, TC=C0G/NP0
  C30 C31 C41 C42: CreateDate=10.12.2014, LatestRevisionDate=10.12.2014
  C48 C49 C52 C53: CreateDate=10/12/2014, LatestRevisionDate=10/12/2014
C50 C51: library part CC0603_100NF_50V_10%_X5R, "Non-polarised capacitor", Case=0603, Manufacturer=GENERIC, Manufacturer1 ComponentHeight=0.9mm, Manufacturer1 Example=TDK, Manufacturer1 Part Number=C1608X5R1H104K080, Tolerance=±10%, Voltage=50V, Author="CERN DEM MR", Component Type=Standard, CreateDate=08.01.2016, HelpURL=\\cern.ch\dfs\Applications\Altium\Datasheets\CC0603_X5R_TDK_C.pdf, LatestRevisionDate=08.01.2016, Manufacturer Part Number=CC0603_100NF_50V_10%_X5R, Mounted=Yes, Part Description="SMD Multilayer Chip Ceramic Capacitor", Part Number=CC0603_100NF_50V_10%_X5R, Pin Count=2, Sense=No, SMD=Yes, Socket=No, Status=None, TC=X5R
D1: "Schottky Diode", Case=SOD-323, Manufacturer=INFINEON, Power=750mA, Voltage=40V, Author="CERN DEM JLC", Bonding=No, Component Type=Standard, ComponentHeight=1.1mm, CreateDate=12.11.2014, Device=BAT165, HelpURL=\\cern.ch\dfs\Applications\Altium\Datasheets\BAT165.pdf, LatestRevisionDate=12.11.2014, Manufacturer Part Number=BAT165, Mounted=Yes, PackageDescription="Small Outline Diode (SOD-323), 1.70mm W X 1.25mm L X 1.10mm H body,  IPC Medium Density", Part Description="Medium Power AF Schottky Diode", Part Number=BAT165, Pin Count=2, PressFit=No, Sense=No, SMD=Yes, Socket=No
D2 D3 D4 D5 D6 D7 D8 D9 D10 D11 D12 D13 D14 D15: "Diode", Case=SOD323, Manufacturer="NXP SEMICONDUCTORS", Power=200mA, Voltage=75V, Author="CERN DEM JLC", Bonding=No, Component Type=Standard, ComponentHeight=1.1mm, CreateDate=01/10/2013, Device=BAS416, HelpURL=\\cern.ch\dfs\Applications\Altium\Datasheets\BAS416.pdf, LatestRevisionDate=01/10/2013, Manufacturer Part Number=BAS416, Mounted=Yes, PackageDescription="Small Outline Diode (SOD-323), 1.70mm W X 1.25mm L X 1.10mm H body,  IPC Medium Density", Part Description="Low-Leakage Diode", Part Number=BAS416, Pin Count=2, PressFit=No, Sense=No, SMD=Yes, Socket=No
IC1: "MAX V 1.8V CPLD, 54 IOs, 160 Logic Elements, 64-Pin EQFP, Automotive Temperature, Speed Grade 5, Pb-Free", Case=QFP64, Manufacturer=ALTERA, Author="CERN DEM JLC", Bonding=No, Component Type=Standard, ComponentHeight=1.2mm, ComponentLink1Description="Package Drawing", ComponentLink1URL=\\cern.ch\dfs\Applications\Altium\Datasheets\5M160ZE64A5N_Package.pdf, ComponentLink2Description=Pinout, ComponentLink2URL=\\cern.ch\dfs\Applications\Altium\Datasheets\5M160ZE64A5N_Pinout.pdf, CreateDate=07.01.2015, Device=5M160ZE64A5N, HelpURL=\\cern.ch\dfs\Applications\Altium\Datasheets\5M160ZE64A5N.pdf, LatestRevisionDate=27.10.2022, Manufacturer Part Number=5M160ZE64A5N, Mounted=Yes, PackageDescription="QFP, 0.40mm Pitch, Square; 64 pin, 7.00mm L X 7.00mm W X 1.20mm H body (w/Thermal Tab 5.50 X 5.50mm), IPC Medium Density", Part Description="MAX V 1.8V CPLD, 54 IOs, 160 Logic Elements, 64-Pin EQFP, Automotive Temperature, Speed Grade 5, Pb-Free", Part Number=5M160ZE64A5N, Pin Count=65, PressFit=No, Sense=No, SMD=Yes, Socket=No, Status="Not Recommended"
IC2: "600mA CMOS Low Dropout Linear Regulator with Enable", Case=SOT25, Manufacturer="DIODES INCORPORATED", Manufacturer Part Number=AP2112K-1.8, Author="CERN DEM JLC", Bonding=No, Component Type=Standard, ComponentHeight=1.4mm, CreateDate=13.06.2018, Device=AP2112K-1.8TRG1, HelpURL=\\cern.ch\dfs\Applications\Altium\Datasheets\AP2112K-1.8TRG1.pdf, LatestRevisionDate=27.06.2022, Mounted=Yes, PackageDescription="SOT23, 0.95mm Pitch; 5 Pin, 1.6mm W X 3.0mm L X 1.40mm H body, IPC Medium Density", Part Description="1.8V 600mA CMOS Low Dropout Linear Regulator with Enable", Part Number=AP2112K-1.8TRG1, Pin Count=5, PressFit=No, Sense=No, SMD=Yes, Socket=No
IC3: "High Precision Low Noise Low Dropout Voltage Reference", Case=SOIC8, Manufacturer="TEXAS INSTRUMENTS", Author="CERN DEM JLC", Bonding=No, Component Type=Standard, ComponentHeight=1.75mm, CreateDate=17.11.2014, Device=LM4140ACM-1.2/NOPB, HelpURL=\\cern.ch\dfs\Applications\Altium\Datasheets\LM4140ACM-1.2-NOPB.pdf, LatestRevisionDate=17.11.2014, Manufacturer Part Number=LM4140ACM-1.2/NOPB, Mounted=Yes, PackageDescription="SOIC 8, Pitch 1.27mm, Body 4x5mm, IPC Medium Density", Part Description="1.2V 0.1% 3 ppm/°C, High Precision Low Noise Low Dropout Voltage Reference", Part Number=LM4140ACM-1.2/NOPB, Pin Count=8, PressFit=No, Sense=No, SMD=Yes, Socket=No
IC4: "800 mA Ultralow Noise, High PSRR, RF Linear Regulator", Case=SON8, Manufacturer="ANALOG DEVICES", Manufacturer Part Number=ADM7151ACP, Author="CERN DEM JLC", Bonding=No, Component Type=Standard, ComponentHeight=0.8mm, CreateDate=23.04.2015, Device=ADM7151ACPZ, HelpURL=\\cern.ch\dfs\Applications\Altium\Datasheets\ADM7151ACPZ.pdf, LatestRevisionDate=31.03.2022, Mounted=Yes, PackageDescription="SON, (DFN) 0.50mm Pitch; 8 pin, 3.00mm W X 3.00mm L X 0.80mm H body (w/Thermal Tab 1.70 X2.44mm), IPC Medium Density", Part Description="Adjustable 1.5V to 5.1V, 800 mA Ultralow Noise, High PSRR, RF Linear Regulator", Part Number=ADM7151ACPZ, Pin Count=9, PressFit=No, Sense=No, SMD=Yes, Socket=No
IC5: "Low Input Voltage, 0.7V Boost Converter With 5.5uA Quiescent Current", Case=SOT363, Manufacturer="TEXAS INSTRUMENTS", Manufacturer Part Number=TPS61222DCK, Author="CERN DEM BC", Bonding=No, Component Type=Standard, ComponentHeight=1.1mm, CreateDate=27.02.2017, Device=TPS61222DCKT, HelpURL=\\cern.ch\dfs\Applications\Altium\Datasheets\TPS61222DCKT.pdf, LatestRevisionDate=13.06.2022, Mounted=Yes, PackageDescription="SOT353, SC70-6, 0.65mm Pitch; 6 Pin, 1.25mm W X 2.00mm L X 1.10mm H body, IPC Medium Density", Part Description="Low Input Voltage, 0.7V Boost Converter with 5.5uA Quiescent Current", Part Number=TPS61222DCKT, Pin Count=6, PressFit=No, Sense=No, SMD=Yes, Socket=No
IC6: library part CMP-0384-01794-1, "Double Channel RRIO Operational Amplifier, 3.4 MHz BW, 500 mV/us SR, Industrial, 8-pin SOP (RM-8), Reel", Amplifiers Per Package=2, Generic Part Number=ADA4528-2, Input Bias Current=125pA, Input Offset Voltage=300nV, Manufacturer="Analog Devices", Code_JEDEC=MO-187-AA, ComponentLink1Description="Manufacturer URL", ComponentLink1URL=http://www.analog.com/en/index.html, ComponentLink2Description=Datasheet, ComponentLink2URL=http://www.analog.com/static/imported-files/data_sheets/ADA4528-1_4528-2.pdf, ComponentLink3Description="Package Specification", ComponentLink3URL=http://www.analog.com/static/imported-files/packages/PKG_PDF/MSOP%28RM%29/RM_8.pdf, DatasheetVersion="Rev. C", Iq/Amp=1.5mA, Manufacturer Part Number=ADA4528-2ARMZ-RL, Mounting Technology="Surface Mount", PackageDescription="8-Pin Mini Small Outline Package, Body 3 x 3 mm, Pitch 0.65 mm", PackageReference=RM-8, Packing=Reel, Slew Rate=500mV/us, Small Signal Bandwidth=3.4MHz, V Span Max=5.5V, V Span Min=2.2V
IC7: "600mA CMOS Low Dropout Linear Regulator with Enable", Case=SOT25, Manufacturer="DIODES INCORPORATED", Manufacturer Part Number=AP2112K-3.3, Author="CERN DEM MR", Bonding=No, Component Type=Standard, ComponentHeight=1.4mm, CreateDate=13.12.2017, Device=AP2112K-3.3TRG1, HelpURL=\\cern.ch\dfs\Applications\Altium\Datasheets\AP2112K-3.3TRG1.pdf, LatestRevisionDate=27.06.2022, Mounted=Yes, PackageDescription="SOT23, 0.95mm Pitch; 5 Pin, 1.6mm W X 3.0mm L X 1.40mm H body, IPC Medium Density", Part Description="3.3V 600mA CMOS Low Dropout Linear Regulator with Enable", Part Number=AP2112K-3.3TRG1, Pin Count=5, PressFit=No, Sense=No, SMD=Yes, Socket=No
IC8: library part ADC_AD7172-2, "32-Bit, 10 kSPS, Sigma-Delta ADC with 100 µs Settling and True Rail-to-Rail Buffers", Case=TSSOP24, Manufacturer="ANALOG DEVICES", Author=GK, Bonding=No, Component Type=Standard, ComponentHeight=1.2mm, CreateDate=14/12/2017, Device=AD7172-2BRUZ, HelpURL=\\cern.ch\dfs\Applications\Altium\Datasheets\AD7177-2BRUZ.pdf, LatestRevisionDate=14/12/2017, Manufacturer Part Number=AD7172-2BRUZ, Mounted=Yes, PackageDescription="SOP, 0.65mm Pitch; 24 Pin, 4.40mm W X 5.00mm L X 1.20mm H Body IPC Medium Density", Part Description="Low Power, 24-Bit, 31.25 kSPS, Sigma-DeltaADC with True Rail-to-Rail Buffers", Part Number=AD7172-2BRUZ, Pin Count=24, PressFit=No, Sense=No, SMD=Yes, Socket=No
J1: "TC2030-MCP and TC2050-IDC Pad Contact", Author="CERN DEM HF", Component Type="Standard (No BOM)", ComponentHeight=0mm, CreateDate=02.05.2024, Family=TC2050-IDC, HelpURL=\\cern.ch\dfs\Applications\Altium\Datasheets\TC2050-IDC.pdf, LatestRevisionDate=02.05.2024, Mounted=No, PackageDescription="10 X 31mil Diameter SMD Pad For TC2030-MCP Legged Connector", Part Description="10 X 31mil Diameter SMD Pad For TC2050-IDC Legged Connector", Part Number=TC2050-IDC, Pin Count=10, Sense=No, SMD=Yes, Socket=No, Status=None
J4 J10: library part "PCB Edge Connector 12 (2x6)", "PCB Edge Connector 12 (2x6)", Part Number=EDGE10T1B6_P200W1000L0F100X400, Author="CERN DEM MR", Component Type="Standard (No BOM)", ComponentHeight=0mm, CreateDate=14.02.2018, HelpURL=\\cern.ch\dfs\Applications\Altium\Datasheets\EDGE10T1B6_P200W1000L0F100X400.pdf, LatestRevisionDate=14.02.2018, Mounted=No, Part Description="10 Contacts Board Edge Connector, Pitch 2mm, Length 0mm, Width 10mm, Finger Lenght 4mm, Finger Width 1mm", Pin Count=12, PressFit=No, Sense=No, SMD=No, Socket=No, Status=None
J9 J11: library part "PCB Edge Connector 12 (2x6) R", "PCB Edge Connector 12 (2x6)", Part Number=EDGE12T5B10_P200W1000L0F100X400, Author=GK, Component Type="Standard (No BOM)", ComponentHeight=0mm, CreateDate=14.02.2018, HelpURL=\\cern.ch\dfs\Applications\Altium\Datasheets\EDGE10T5B10_P200W1000L0F100X400.pdf, LatestRevisionDate=14.02.2018, Mounted=No, Part Description="12 Contacts Board Edge Connector, Pitch 2mm, Length 0mm, Width 10mm, Finger Lenght 4mm, Finger Width 1mm", Pin Count=12, PressFit=No, Sense=No, SMD=No, Socket=No, Status=None
L1 L2 L3: library part IND1008_4.7UH_20%_MURATA_DFE252012P, "Inductor", Case=1008, Manufacturer=MURATA, Manufacturer Part Number=DFE252012P-4R7M, Power=2A, Resistance=0.2R, Tolerance=±20%, Author="CERN DEM BC", Component Type=Standard, ComponentHeight=1.2mm, CreateDate=03.09.2020, HelpURL=\\cern.ch\dfs\Applications\Altium\Datasheets\IND_MURATA_DFE252012P-4R7M.pdf, LatestRevisionDate=03.09.2020, Mounted=Yes, Part Description="Metal Alloy Power Inductor (DFE252012P Series)", Part Number=IND1008_4.7UH_20%_MURATA_DFE252012P, Pin Count=2, Sense=No, SMD=Yes, Socket=No
LD1 LD18 LD19 LD20 LD21 LD26 LD27 LD28: library part LED_KINGBRIGHT_KP-1608CGCK, "LED Green 1C 2A", Case=0603, Manufacturer=KINGBRIGHT, Manufacturer Part Number=KP-1608CGCK, Author="CERN DEM HF", Bonding=No, Color=Green, Component Type=Standard, ComponentHeight=1.1mm, CreateDate=01.10.2021, HelpURL=\\cern.ch\dfs\Applications\Altium\Datasheets\LED_KINGBRIGHT_KP-1608CGCK.pdf, LatestRevisionDate=01.10.2021, Mounted=Yes, PackageDescription="SMT Green LED, Case 0603, Body L 1.60mm x W 0.80mm x H 1.10mm", Part Description="1.6x0.8mm SMD Chip Green LED Lamp", Part Number=LED_KINGBRIGHT_KP-1608CGCK, Pin Count=2, PressFit=No, Sense=No, SMD=Yes, Socket=No
MP1 MP2: library part 97730306330R, "WA-SMSI SMT Steel Spacer with internal Thread Bottom closed, OD 3.3mm, M1.6 x 3mm", Manufacturer="Wurth Elektronik", Operating Temperature Max=150°C, Operating Temperature Min=-55°C, Category="SMT Spacers", ComponentLink1Description="Website Link", ComponentLink1URL=https://www.we-online.com/redexpert/article/97730306330R?ad, ComponentLink2Description="Datasheet Link", ComponentLink2URL=https://www.we-online.com/redexpert/spec/97730306330R?ad, Height=3mm, Inside Thread Length=1.8mm, Manufacturer Part Number=97730306330R, Match Code=WA-SMSI, Material=Steel, Mount="Surface Mount", Outside Diameter=3.3mm, Packaging="Tape and Reel", Surface=Tin, Thread Size=M1.6
NT1 NT2 NT3 NT4 NT5 NT6 NT7 NT8 NT9 NT10 NT11 NT12: library part "Net Tie 3", Author="CERN DEM HF", Component Type="Net Tie", ComponentHeight=0mm, CreateDate=23.09.2024, Family="Net Tie", HelpURL=Undefined, LatestRevisionDate=23.09.2024, Mounted=No, PackageDescription="SMD Net Tie", Part Description="Net Tie (2 Nets)", Part Number="Net Tie 3", Pin Count=2, Sense=No, SMD=No, Socket=No, Status=None
P1 P2: "WR-TBL Series 382 Vertical PCB Header, THT, pitch 2.5mm, 4p", Manufacturer="Wurth Elektronik", Operating Temperature Max=105°C, Operating Temperature Min=-40°C, Rated Current=4A, Working Voltage=300V, Application=Pluggable, Category="Terminal Blocks", ComponentLink1Description="Website Link", ComponentLink1URL=https://www.we-online.com/redexpert/article/691382000004?ad, ComponentLink2Description="Datasheet Link", ComponentLink2URL=https://www.we-online.com/redexpert/spec/691382000004?ad, Manufacturer Part Number=691382000004, Match Code=WR-TBL, Modularity=No, Mount="Through Hole", Number of Pins=4, Number of Rows=1, Orientation=Vertical, Packaging=Box, Pitch=2.5mm
R1 R5 R26 R27 R32 R33 R40 R41 R46 R47 R48: library part R0402_3K3_1%_0.0625W_100PPM, "Resistor - 1%", Case=0402, Manufacturer=GENERIC, Manufacturer1 ComponentHeight=0.4mm, Manufacturer1 Example="YAGEO PHYCOMP", Manufacturer1 Part Number=232270673302L, Power=0.0625W, Tolerance=±1%, Author="CERN DEM JLC", Component Type=Standard, CreateDate=03.12.2007, HelpURL=\\cern.ch\dfs\Applications\Altium\Datasheets\R0402_Phycomp_RC0402.pdf, LatestRevisionDate=17.10.2012, Manufacturer Part Number=R0402_3K3_1%_0.0625W_100PPM, Mounted=Yes, Part Description="General Purpose Thick Film Chip Resistor", Part Number=R0402_3K3_1%_0.0625W_100PPM, Pin Count=2, PressFit=No, Sense=No, SMD=Yes, Socket=No, Status="Not Recommended", TC=±100ppm/°C
R2: library part R0402_10K_1%_0.0625W_100PPM, "Resistor - 1%", Case=0402, Manufacturer=GENERIC, Manufacturer1 ComponentHeight=0.4mm, Manufacturer1 Example="YAGEO PHYCOMP", Manufacturer1 Part Number=232270671003L, Power=0.0625W, Tolerance=±1%, Author="CERN DEM JLC", Component Type=Standard, CreateDate=03.12.2007, HelpURL=\\cern.ch\dfs\Applications\Altium\Datasheets\R0402_Phycomp_RC0402.pdf, LatestRevisionDate=17.10.2012, Manufacturer Part Number=R0402_10K_1%_0.0625W_100PPM, Mounted=Yes, Part Description="General Purpose Thick Film Chip Resistor", Part Number=R0402_10K_1%_0.0625W_100PPM, Pin Count=2, PressFit=No, Sense=No, SMD=Yes, Socket=No, Status="Not Recommended", TC=±100ppm/°C
R3 R8: library part R0402_36K_1%_0.0625W_100PPM, "Resistor - 1%", Case=0402, Manufacturer=GENERIC, Manufacturer1 ComponentHeight=0.4mm, Manufacturer1 Example="YAGEO PHYCOMP", Manufacturer1 Part Number=232270673603L, Power=0.0625W, Tolerance=±1%, Author="CERN DEM JLC", Component Type=Standard, CreateDate=03.12.2007, HelpURL=\\cern.ch\dfs\Applications\Altium\Datasheets\R0402_Phycomp_RC0402.pdf, LatestRevisionDate=17.10.2012, Manufacturer Part Number=R0402_36K_1%_0.0625W_100PPM, Mounted=Yes, Part Description="General Purpose Thick Film Chip Resistor", Part Number=R0402_36K_1%_0.0625W_100PPM, Pin Count=2, PressFit=No, Sense=No, SMD=Yes, Socket=No, Status="Not Recommended", TC=±100ppm/°C
R4: library part R0402_91K_1%_0.0625W_100PPM, "Resistor - 1%", Case=0402, Manufacturer=GENERIC, Manufacturer1 ComponentHeight=0.4mm, Manufacturer1 Example="YAGEO PHYCOMP", Manufacturer1 Part Number=232270679103L, Power=0.0625W, Tolerance=±1%, Author="CERN DEM JLC", Component Type=Standard, CreateDate=03.12.2007, HelpURL=\\cern.ch\dfs\Applications\Altium\Datasheets\R0402_Phycomp_RC0402.pdf, LatestRevisionDate=17.10.2012, Manufacturer Part Number=R0402_91K_1%_0.0625W_100PPM, Mounted=Yes, Part Description="General Purpose Thick Film Chip Resistor", Part Number=R0402_91K_1%_0.0625W_100PPM, Pin Count=2, PressFit=No, Sense=No, SMD=Yes, Socket=No, Status="Not Recommended", TC=±100ppm/°C
R6 R7 R11 R14: library part R0402_120K_1%_0.0625W_100PPM, "Resistor - 1%", Case=0402, Manufacturer=GENERIC, Manufacturer1 ComponentHeight=0.4mm, Manufacturer1 Example="YAGEO PHYCOMP", Manufacturer1 Part Number=232270671204L, Power=0.0625W, Tolerance=±1%, Author="CERN DEM JLC", Component Type=Standard, CreateDate=03.12.2007, HelpURL=\\cern.ch\dfs\Applications\Altium\Datasheets\R0402_Phycomp_RC0402.pdf, LatestRevisionDate=17.10.2012, Manufacturer Part Number=R0402_120K_1%_0.0625W_100PPM, Mounted=Yes, Part Description="General Purpose Thick Film Chip Resistor", Part Number=R0402_120K_1%_0.0625W_100PPM, Pin Count=2, PressFit=No, Sense=No, SMD=Yes, Socket=No, Status="Not Recommended", TC=±100ppm/°C
R9 R15: library part R0402_0R_JUMPER, "Resistor", Case=0402, Manufacturer=GENERIC, Manufacturer1 ComponentHeight=0.4mm, Manufacturer1 Example="YAGEO PHYCOMP", Manufacturer1 Part Number=232270591001L, Author="CERN DEM JLC", Component Type=Standard, CreateDate=12/3/2007, HelpURL=\\cern.ch\dfs\Applications\Altium\Datasheets\R0402_Phycomp_RC0402.pdf, LatestRevisionDate=10/17/2012, Manufacturer Part Number=R0402_0R_JUMPER, Mounted=Yes, Part Description="1A (0.05R Max DC Resistance) Zero Ohm Jumper", Part Number=R0402_0R_JUMPER, Pin Count=2, PressFit=No, Sense=No, SMD=Yes, Socket=No, Status="Not Recommended"
R10 R16: library part R0805_120K_0.1%_0.125W_25PPM, "Resistor - 0.1%", Case=0805, Manufacturer=GENERIC, Manufacturer1 ComponentHeight=0.6mm, Manufacturer1 Example=PANASONIC, Manufacturer1 Part Number=ERA6AEB124V, Power=0.125W, Tolerance=±0.1%, Author="CERN DEM JLC", Component Type=Standard, CreateDate=04.06.2015, HelpURL=\\cern.ch\dfs\Applications\Altium\Datasheets\R0805_PANASONIC_ERA.pdf, LatestRevisionDate=04.06.2015, Manufacturer Part Number=R0805_120K_0.1%_0.125W_25PPM, Mounted=Yes, Part Description="Thin Film Chip Resistor", Part Number=R0805_120K_0.1%_0.125W_25PPM, Pin Count=2, PressFit=No, Sense=No, SMD=Yes, Socket=No, Status="Not Recommended", TC=±25ppm
R12 R13 R30: library part R0402_33R_1%_0.0625W_100PPM, "Resistor - 1%", Case=0402, Manufacturer=GENERIC, Manufacturer1 ComponentHeight=0.4mm, Manufacturer1 Example="YAGEO PHYCOMP", Manufacturer1 Part Number=232270673309L, Power=0.0625W, Tolerance=±1%, Author="CERN DEM JLC", Component Type=Standard, CreateDate=03/12/2007, HelpURL=\\cern.ch\dfs\Applications\Altium\Datasheets\R0402_Phycomp_RC0402.pdf, LatestRevisionDate=17/10/2012, Manufacturer Part Number=R0402_33R_1%_0.0625W_100PPM, Mounted=Yes, Part Description="General Purpose Thick Film Chip Resistor", Part Number=R0402_33R_1%_0.0625W_100PPM, Pin Count=2, PressFit=No, Sense=No, SMD=Yes, Socket=No, Status="Not Recommended", TC=±100ppm/°C
R17 R23 R25 R35: library part R0805_5K_0.01%_0.2W_0.2PPM_VISHAY_VSMP, "Resistor - 0.01%", Case=0805, Manufacturer="VISHAY PRECISION", Manufacturer1 ComponentHeight=0.64mm, Manufacturer Part Number=Y16245K00000T9R, Power=0.2W, Tolerance=±0.01%, Author="CERN DEM JLC", Component Type=Standard, CreateDate=22.09.2011, HelpURL=\\cern.ch\dfs\Applications\Altium\Datasheets\R0805_VISHAY_VSMP.pdf, LatestRevisionDate=22.09.2011, Mounted=Yes, Part Description="Ultra High Precision Foil Wraparound Surface Mount Chip Resistor", Part Number=R0805_5K_0.01%_0.2W_0.2PPM_VISHAY_VSMP, Pin Count=2, PressFit=No, Sense=No, SMD=Yes, Socket=No, Status=None, TC=±0.2ppm/°C
R18 R24: library part R0603_0R_JUMPER, "Resistor", Case=0603, Manufacturer=GENERIC, Manufacturer1 ComponentHeight=0.55mm, Manufacturer1 Example="NIC COMPONENT", Manufacturer1 Part Number=NRC06Z0, Author="CERN DEM JLC", Component Type=Standard, CreateDate=03.12.2007, HelpURL=\\cern.ch\dfs\Applications\Altium\Datasheets\R0603_NIC_NRC.pdf, LatestRevisionDate=13.03.2008, Manufacturer Part Number=R0603_0R_JUMPER, Mounted=Yes, Part Description="1A (0.05R Max DC Resistance) Zero Ohm Jumper", Part Number=R0603_0R_JUMPER, Pin Count=2, PressFit=No, Sense=No, SMD=Yes, Socket=No, Status=Preferred
R19 R21 R28 R31: library part R0402_51R_1%_0.0625W_100PPM, "Resistor - 1%", Case=0402, Manufacturer=GENERIC, Manufacturer1 ComponentHeight=0.4mm, Manufacturer1 Example="YAGEO PHYCOMP", Manufacturer1 Part Number=232270675109L, Power=0.0625W, Tolerance=±1%, Author="CERN DEM JLC", Component Type=Standard, CreateDate=03/12/2007, HelpURL=\\cern.ch\dfs\Applications\Altium\Datasheets\R0402_Phycomp_RC0402.pdf, LatestRevisionDate=17/10/2012, Manufacturer Part Number=R0402_51R_1%_0.0625W_100PPM, Mounted=Yes, Part Description="General Purpose Thick Film Chip Resistor", Part Number=R0402_51R_1%_0.0625W_100PPM, Pin Count=2, PressFit=No, Sense=No, SMD=Yes, Socket=No, Status="Not Recommended", TC=±100ppm/°C
R20 R22 R29 R34: library part R0402_2K4_1%_0.0625W_100PPM, "Resistor - 1%", Case=0402, Manufacturer=GENERIC, Manufacturer1 ComponentHeight=0.4mm, Manufacturer1 Example="YAGEO PHYCOMP", Manufacturer1 Part Number=232270672702L, Manufacturer Part Number=R0402_2K7_1%_0.0625W_100PPM, Power=0.0625W, Tolerance=±1%, Author="CERN DEM JLC", Component Type=Standard, CreateDate=03.12.2007, HelpURL=\\cern.ch\dfs\Applications\Altium\Datasheets\R0402_Phycomp_RC0402.pdf, LatestRevisionDate=17.10.2012, Mounted=Yes, Part Description="General Purpose Thick Film Chip Resistor", Part Number=R0402_2K7_1%_0.0625W_100PPM, Pin Count=2, PressFit=No, Sense=No, SMD=Yes, Socket=No, Status="Not Recommended", TC=±100ppm/°C
R36 R37 R38 R39: library part R0402_270R_1%_0.0625W_100PPM, "Resistor - 1%", Case=0402, Manufacturer=GENERIC, Manufacturer1 ComponentHeight=0.4mm, Manufacturer1 Example="YAGEO PHYCOMP", Manufacturer1 Part Number=232270672701L, Power=0.0625W, Tolerance=±1%, Author="CERN DEM JLC", Component Type=Standard, CreateDate=03.12.2007, HelpURL=\\cern.ch\dfs\Applications\Altium\Datasheets\R0402_Phycomp_RC0402.pdf, LatestRevisionDate=17.10.2012, Manufacturer Part Number=R0402_270R_1%_0.0625W_100PPM, Mounted=Yes, Part Description="General Purpose Thick Film Chip Resistor", Part Number=R0402_270R_1%_0.0625W_100PPM, Pin Count=2, PressFit=No, Sense=No, SMD=Yes, Socket=No, Status="Not Recommended", TC=±100ppm/°C